# EAGLE board PIC12F675P Breakout Board (EAGLE 6.4)
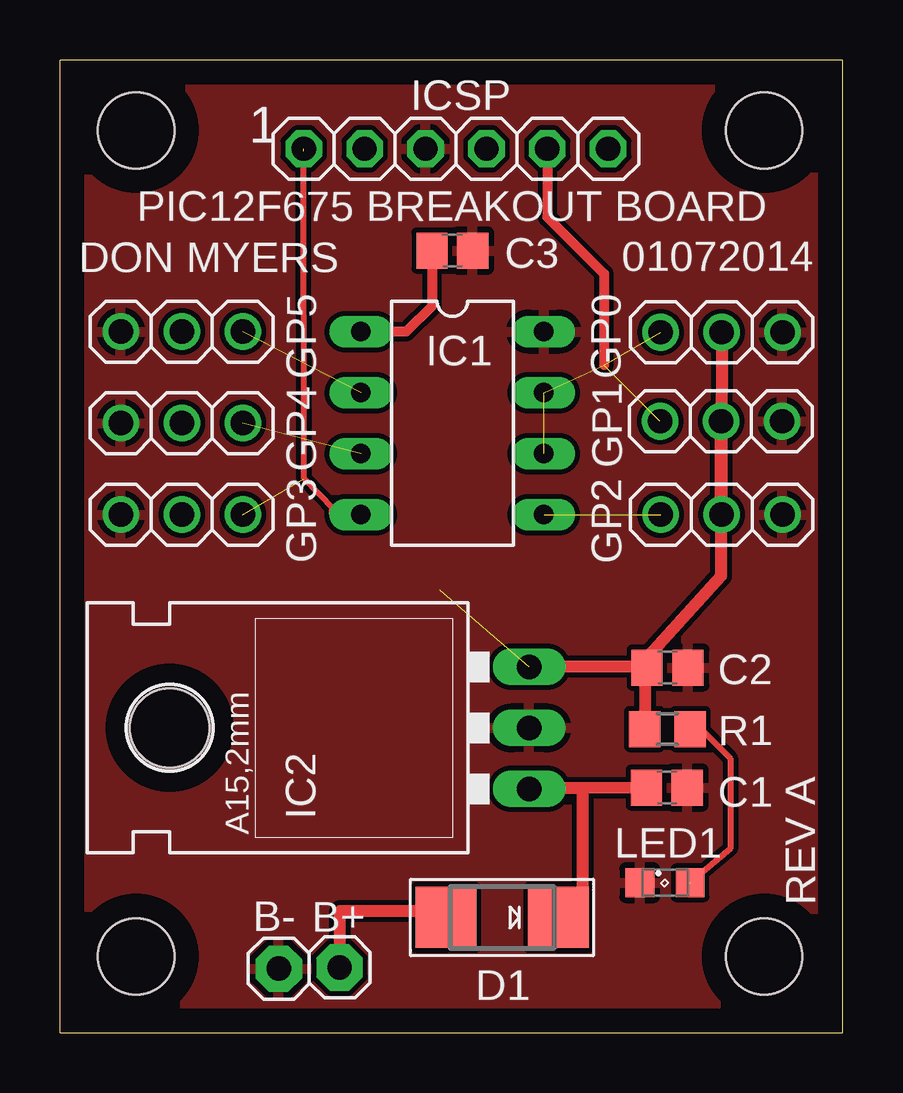
[diagram p0: board, top side]
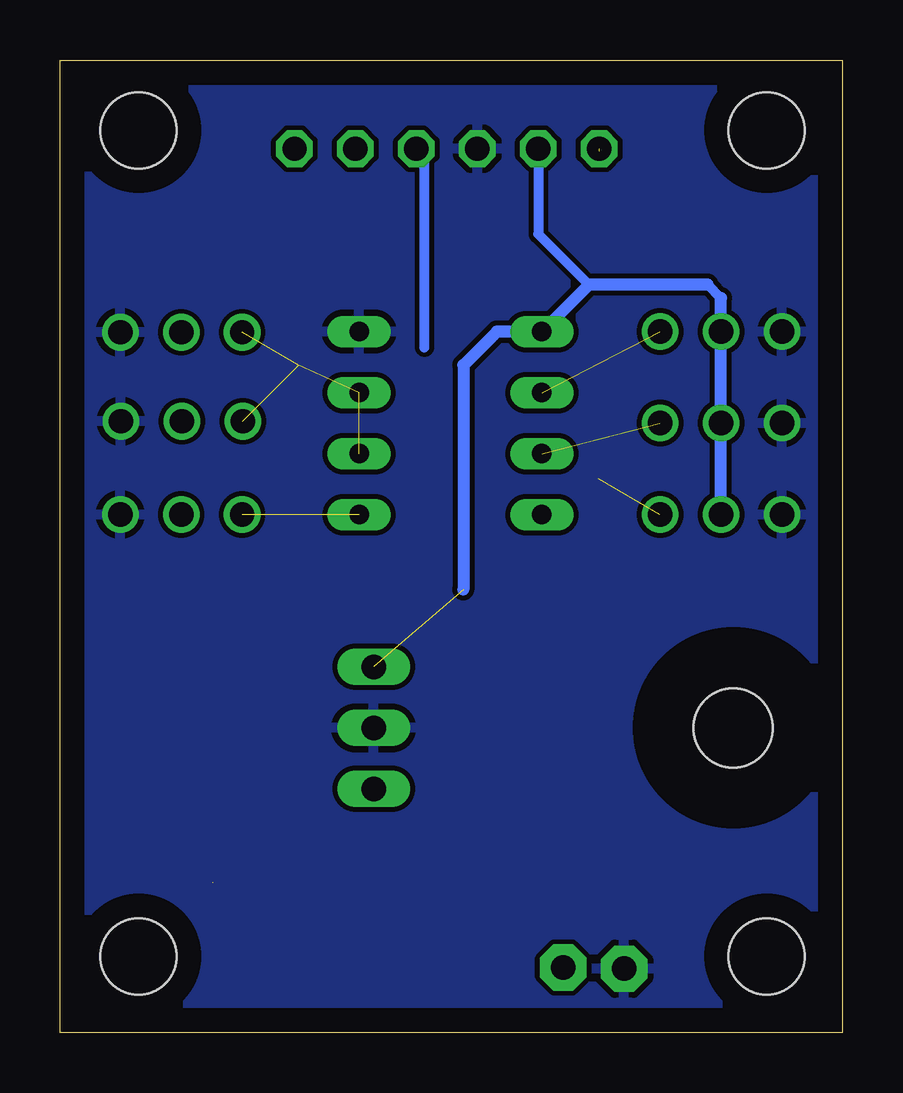
[diagram p1: board, bottom side, seen from below]

Size 32.64 x 40.53 mm. Coordinates in mm from the lower left corner, seen from the top.
Outline: 0,0 0,0
Outline: 0,0 32.64,0 32.64,40.53 0,40.53
Outline: 0,40.53 0,40.53
Outline: 0,0 0,40.53
Copper layers (1*16): Top 0.035mm / dielectric 1.5mm / Bottom 0.035mm
Design rules "default": minimum track width 10mil, minimum drill 24mil, track to track 8mil, track to pad 8mil, pad to pad 8mil, via to via 8mil, smd to smd 8mil, copper to edge 40mil, drill to drill 8mil, minimum pad ring 10mil, minimum via ring 8mil, stop-mask expansion 4mil, vias tented up to drill 0mil, thermal gap 10mil
Holes 3.17 mm at 3.17,3.17 29.36,3.17 29.36,37.59 3.17,37.59

## Footprints (pad centres in the part's own frame; a part is rotated, then mirrored left to right if it is on the bottom)
1X01 = drill 1.016 pad 1.93 octagon: 1 0,0
C0805 = smd 1.3 x 1.5: 1 -0.85,0; 2 0.85,0
SMADIODE = smd 2.54 x 2.54: A 2.349,0; C -2.349,0
1X03 = drill 1.016: 1 -2.54,0; 2 0,0; 3 2.54,0
DIL8 = drill 0.813 long: 1 -3.81,-3.81; 2 -1.27,-3.81; 3 1.27,-3.81; 4 3.81,-3.81; 5 3.81,3.81; 6 1.27,3.81; 7 -1.27,3.81; 8 -3.81,3.81
78XXL = drill 1.016 long: GND 0,-3.81; IN -2.54,-3.81; OUT 2.54,-3.81 | hole 3.302: 0,11.176
1X06 = drill 1.016 octagon: 1 -6.35,0; 2 -3.81,0; 3 -1.27,0; 4 1.27,0; 5 3.81,0; 6 6.35,0
SML0805 = smd 1.2 x 1.2: A 1.05,0; C -1.05,0
R0805 = smd 1.3 x 1.5: 1 -0.95,0; 2 0.95,0

## Placement (x,y rotation side)
B+  [1X01]  11.66,2.72 0 top
B-  [1X01]  9.12,2.67 0 top
C1  .1uF  [C0805]  25.3,10.21 0 top
C2  1uF  [C0805]  25.32,15.21 0 top
C3  .1uF  [C0805]  16.36,32.59 0 top
D1  [SMADIODE]  18.44,4.8 180 top
GP0  [1X03]  27.58,29.18 180 top
GP1  [1X03]  27.56,25.48 180 top
GP2  [1X03]  27.58,21.59 180 top
GP3  [1X03]  5.08,21.59 180 top
GP4  [1X03]  5.08,25.4 180 top
GP5  [1X03]  5.08,29.21 180 top
IC1  PIC12F675P  [DIL8]  16.36,25.4 270 top
IC2  [78XXL]  15.75,12.7 90 top
ICSP  [1X06]  16.51,36.83 0 top
LED1  [SML0805]  25.22,6.25 0 top
R1  330  [R0805]  25.32,12.65 0 top

## Library data of the parts
B+ B- C1-C3 D1 GP0 GP1-GP5 ICSP = adafruit
IC1 = microchip; MF: MICROCHIP; MPN: PIC12F675-E/P; OC_FARNELL: 9759018; OC_NEWARK: 92C4340
IC2 = v-reg
LED1 = led
R1 = rcl

## Nets
GND: B-.1 C1.2 C2.2 C3.2 GP0.1 GP1.1 GP2.1 GP3.3 GP4.3 GP5.3 IC1.8 IC2.GND ICSP.3 LED1.C
GP2: GP2.3 IC1.5
GP4: GP4.1 IC1.3
GP5: GP5.1 IC1.2
N$1: B+.1 D1.A
N$2: LED1.A R1.2
N$3: C1.1 D1.C IC2.IN
PGC: GP0.3 GP1.3 IC1.6 IC1.7 ICSP.5
PGD: ICSP.4
VDD: C2.1 C3.1 GP0.2 GP1.2 GP2.2 GP3.2 GP4.2 GP5.2 IC1.1 IC2.OUT ICSP.2 R1.1
VPP: GP3.1 IC1.4 ICSP.1

## Tracks (layer width: path | path; a pad name or v marks a point on that pad's centre or on a via)
GND
  pour Bottom: 0.41,40.13 0.41,0.41 32.26,0.41 32.26,0.71 32.23,40.13
  pour Top: 0.41,40.13 0.41,0.41 32.26,0.41 32.23,40.13
GP2  (1 unrouted)
GP4  (1 unrouted)
GP5  (1 unrouted)
N$1
  Top 0.254: 15.24,5.08 D1.A | 11.68,2.79 B+.1
  Top 0.508: 15.24,5.08 11.68,5.08 11.68,2.79
N$2  (1 unrouted)
  Top 0.254: LED1.A 27.94,7.67 27.94,11.43 26.67,12.7 R1.2
N$3
  Top 0.254: D1.C 21.59,5.08 21.79,5.08
  Top 0.406: 19.56,10.19 IC2.IN | 21.51,5 21.79,5
  Top 0.508: C1.1 21.79,10.19 | 21.79,10.19 19.56,10.19 | 21.79,5 21.79,5.08 21.79,10.19
PGC  (4 unrouted)
  Top 0.406: ICSP.5 20.32,33.98 22.68,31.62 22.68,27.81
PGD
  Bottom 0.406: 17.45,28.55 17.45,36.5 ICSP.4
VDD  (1 unrouted)
  Top 0.254: 27.48,21.49 GP0.2 | 24.13,15.24 C2.1 | 24.13,12.7 R1.1
  Top 0.406: GP0.2 27.56,21.59 | GP1.2 27.53,25.4 | R1.1 24.47,12.65 | 24.13,12.7 24.33,12.7 24.41,12.62 | 24.41,15.15 C2.1 | C3.1 15.51,30.27 14.43,29.21 IC1.1
  Top 0.508: GP0.2 27.56,19.02 26.54,17.9 24.13,15.24 IC2.OUT | 27.56,21.59 GP1.2 | 27.53,25.4 GP2.2 | 24.41,12.62 24.41,15.15
  Bottom 0.406: 5.08,30.61 5.64,31.17 | ICSP.2 12.7,33.27 10.59,31.17
  Bottom 0.508: 15.82,18.47 15.82,27.81 14.43,29.21 IC1.1 10.59,31.17 5.64,31.17 | GP3.2 GP4.2 GP5.2 5.08,30.61
VPP  (2 unrouted)
  Top 0.254: 11.43,21.59 IC1.4 | 11.43,21.79 10.19,23.09 10.16,36.73
  Top 0.406: 11.43,21.59 11.43,21.79

## Text on the board
tPlace: 1 | REV A
tNames: PIC12F675 BREAKOUT BOARD | DON MYERS | 01072014